# EAGLE board Quadv3 (EAGLE 9.2.1)
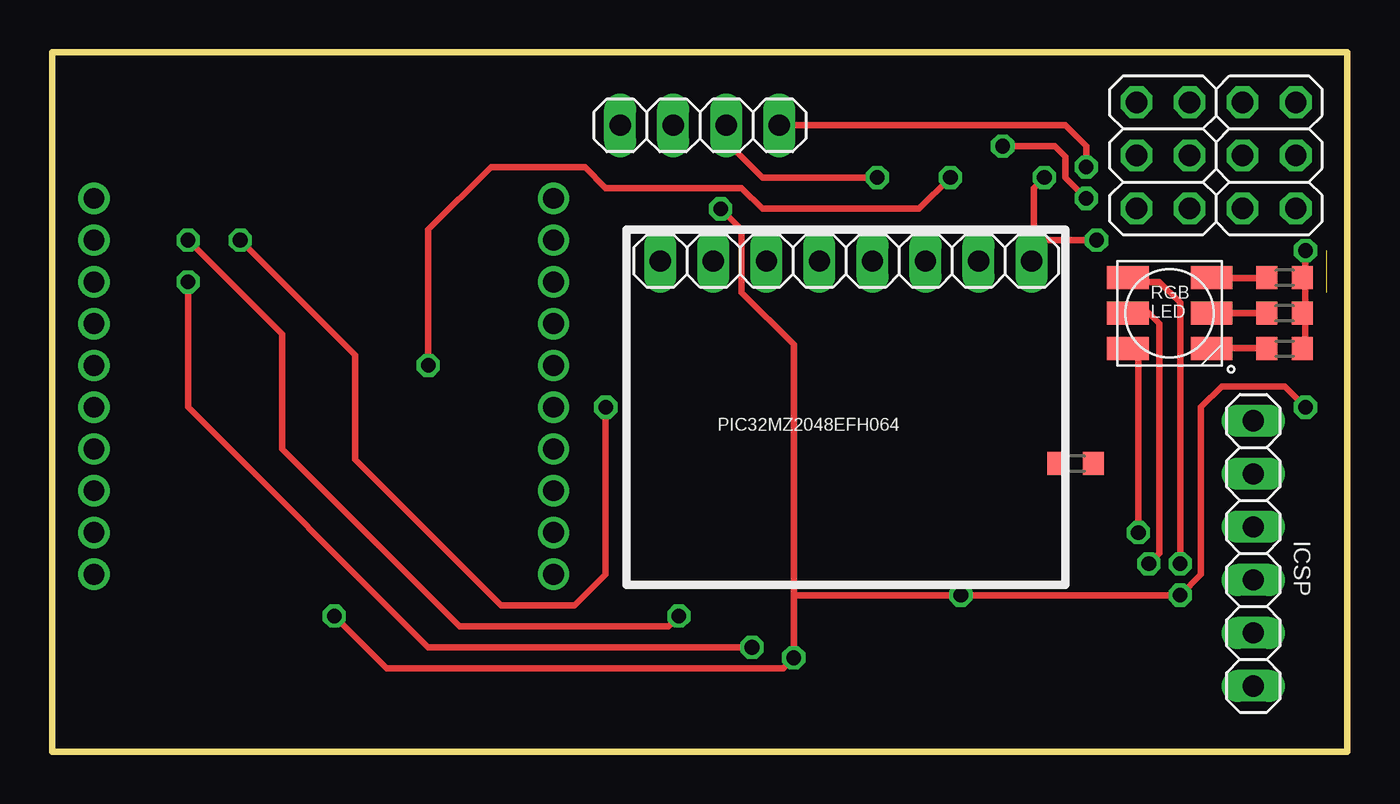
[diagram p0: board, top side]
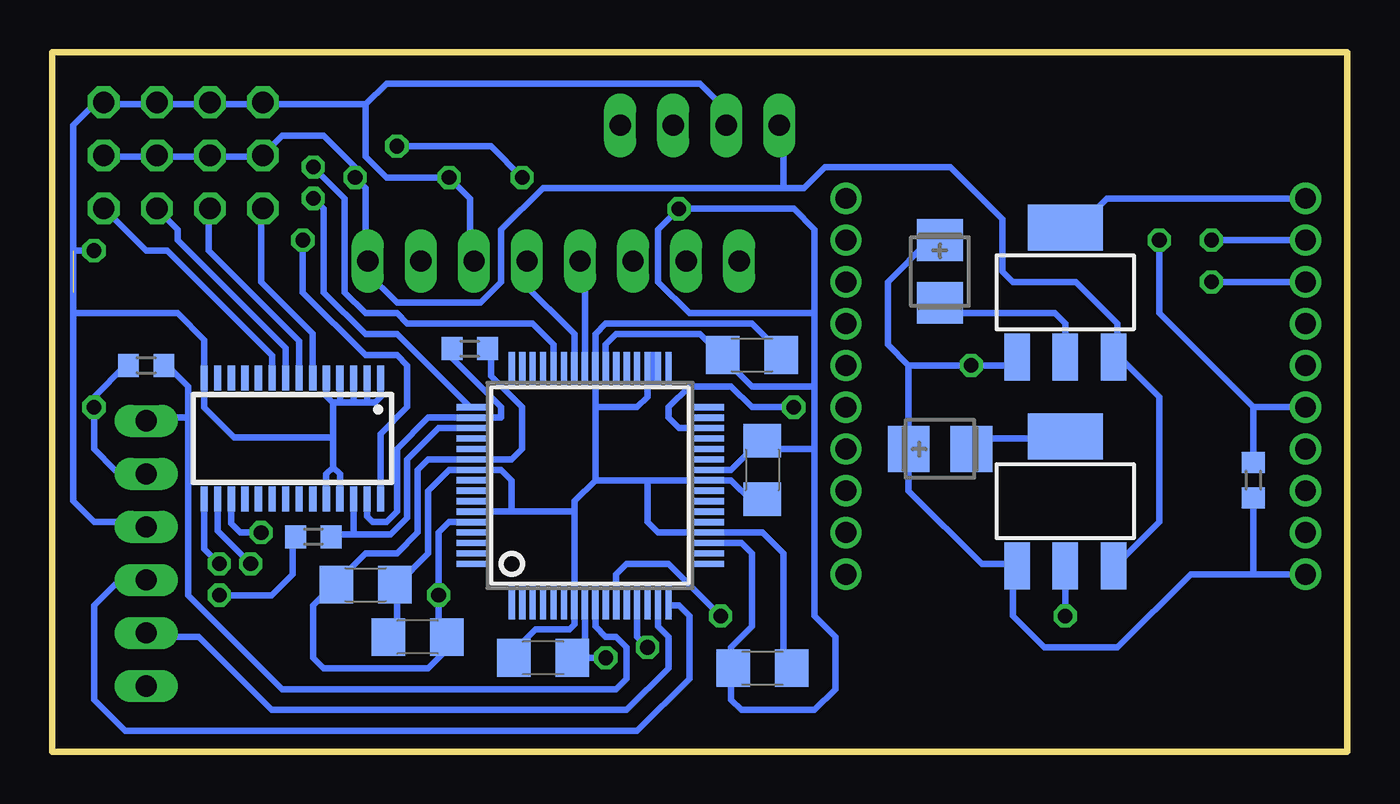
[diagram p1: board, bottom side, seen from below]

Size 62 x 33.5 mm. Coordinates in mm from the lower left corner, seen from the top.
Outline: 0,33.5 0,0 62,0 62,33.5 0,33.5
Copper layers (1*16): Top 0.035mm / dielectric 1.5mm / Bottom 0.035mm
Design rules "default": minimum track width 10mil, minimum drill 24mil, track to track 8mil, track to pad 8mil, pad to pad 8mil, via to via 8mil, smd to smd 8mil, copper to edge 40mil, drill to drill 8mil, minimum pad ring 10mil, minimum via ring 8mil, stop-mask expansion 4mil, vias tented up to drill 0mil, thermal gap 10mil

## Footprints (pad centres in the part's own frame; a part is rotated, then mirrored left to right if it is on the bottom)
1X06 = drill 1.016 long: 1 -6.35,0; 2 -3.81,0; 3 -1.27,0; 4 1.27,0; 5 3.81,0; 6 6.35,0
C1206 = smd 1.6 x 1.8: 1 -1.4,0; 2 1.4,0
TSSOP28 = smd 0.35 x 1.2: 1 -4.225,-2.9; 2 -3.575,-2.9; 3 -2.925,-2.9; 4 -2.275,-2.9; 5 -1.625,-2.9; 6 -0.975,-2.9; 7 -0.325,-2.9; 8 0.325,-2.9; 9 0.975,-2.9; 10 1.625,-2.9; 11 2.275,-2.9; 12 2.925,-2.9; 13 3.575,-2.9; 14 4.225,-2.9; 15 4.225,2.9; 16 3.575,2.9; 17 2.925,2.9; 18 2.275,2.9; 19 1.625,2.9; 20 0.975,2.9; 21 0.325,2.9; 22 -0.325,2.9; 23 -0.975,2.9; 24 -1.625,2.9; 25 -2.275,2.9; 26 -2.925,2.9; 27 -3.575,2.9; 28 -4.225,2.9
1X04 = drill 1.016 long: 1 -3.81,0; 2 -1.27,0; 3 1.27,0; 4 3.81,0
SOT223 = smd 1.219 x 2.235: 1 -2.311,-3.099; 2 0,-3.099; 3 2.311,-3.099 | smd 3.6 x 2.2: 4 0,3.099
R0603 = smd 1 x 1.1: 1 -0.85,0; 2 0.85,0
1X08 = drill 1.016 long: 1 -8.89,0; 2 -6.35,0; 3 -3.81,0; 4 -1.27,0; 5 1.27,0; 6 3.81,0; 7 6.35,0; 8 8.89,0
2X03 = drill 1.016 octagon: 1 -2.54,-1.27; 2 -2.54,1.27; 3 0,-1.27; 4 0,1.27; 5 2.54,-1.27; 6 2.54,1.27
RGBLED5050 = smd 2 x 1.1: 1 -2,1.7; 2 -2,0; 3 -2,-1.7; 4 2,-1.7; 5 2,0; 6 2,1.7
CT3528 = smd 2 x 2.2: + -1.5,0; - 1.5,0
SQFP-S-10X10-64 = smd 0.3 x 1.6: 1 -3.75,-5.6; 2 -3.25,-5.6; 3 -2.75,-5.6; 4 -2.25,-5.6; 5 -1.75,-5.6; 6 -1.25,-5.6; 7 -0.75,-5.6; 8 -0.25,-5.6; 9 0.25,-5.6; 10 0.75,-5.6; 11 1.25,-5.6; 12 1.75,-5.6; 13 2.25,-5.6; 14 2.75,-5.6; 15 3.25,-5.6; 16 3.75,-5.6; 33 3.75,5.6; 34 3.25,5.6; 35 2.75,5.6; 36 2.25,5.6; 37 1.75,5.6; 38 1.25,5.6; 39 0.75,5.6; 40 0.25,5.6; 41 -0.25,5.6; 42 -0.75,5.6; 43 -1.25,5.6; 44 -1.75,5.6; 45 -2.25,5.6; 46 -2.75,5.6; 47 -3.25,5.6; 48 -3.75,5.6 | smd 1.6 x 0.3: 17 5.6,-3.75; 18 5.6,-3.25; 19 5.6,-2.75; 20 5.6,-2.25; 21 5.6,-1.75; 22 5.6,-1.25; 23 5.6,-0.75; 24 5.6,-0.25; 25 5.6,0.25; 26 5.6,0.75; 27 5.6,1.25; 28 5.6,1.75; 29 5.6,2.25; 30 5.6,2.75; 31 5.6,3.25; 32 5.6,3.75; 49 -5.6,3.75; 50 -5.6,3.25; 51 -5.6,2.75; 52 -5.6,2.25; 53 -5.6,1.75; 54 -5.6,1.25; 55 -5.6,0.75; 56 -5.6,0.25; 57 -5.6,-0.25; 58 -5.6,-0.75; 59 -5.6,-1.25; 60 -5.6,-1.75; 61 -5.6,-2.25; 62 -5.6,-2.75; 63 -5.6,-3.25; 64 -5.6,-3.75

## Placement (x,y rotation side)
E$1  [1X06]  57.5,9.5 90 top
E$2  [C1206]  28.5,19 0 bottom
E$3  [C1206]  28,13.5 270 bottom
E$4  [C1206]  28,4 180 bottom
E$5  [TSSOP28]  50.5,15 180 bottom
E$6  [1X04]  31,30 0 top
E$7  [SOT223]  13.5,22 0 bottom
E$8  [R0603]  4.5,13 270 bottom
E$9  [R0603]  49.5,10.3 180 bottom
E$10  [1X08]  38,23.5 0 top
E$11  [2X03]  58.26,28.56 90 top
E$12  [2X03]  53.18,28.56 90 top
E$13  [R0603]  57.5,18.5 0 bottom
E$14  [R0603]  59,22.7 0 top
E$15  [R0603]  59,21 0 top
E$16  [R0603]  59,19.3 0 top
E$17  [C1206]  38.5,4.5 180 bottom
E$18  [C1206]  47,8 0 bottom
E$19  [C1206]  44.5,5.5 180 bottom
E$20  [RGBLED5050]  53.5,21 0 top
E$21  [SOT223]  13.5,12 0 bottom
E$22  [R0603]  42,19.3 180 bottom
E$23  [CT3528]  19.5,14.5 0 bottom
E$27  [CT3528]  19.5,23 270 bottom
E$28  [R0603]  49,13.8 180 top
PIC32MZ2048EFH064  [SQFP-S-10X10-64]  36.25,12.75 0 bottom

## Library data of the parts
E$1 E$6 E$10-E$12 = pinhead
E$2-E$4 E$7-E$9 E$13-E$19 E$21-E$23 E$27 E$28 PIC32MZ2048EFH064 = smd-ipc
E$5 = analog-devices
E$20 = adafruit

## Nets
S$33: E$23.+ E$27.+
S$38: E$20.2

## Tracks (layer width: path | path; a pad name or v marks a point on that pad's centre or on a via)
S$1
  Bottom 0.305: 55.5,16 57.5,16
S$2  (via drill 1)
  other vias: 24,26.5
S$3  (via drill 1)
  other vias: 24,24.5
S$4  (via drill 1)
  other vias: 24,22.5
S$5  (via drill 1)
  other vias: 24,20.5
S$6  (via drill 1)
  other vias: 24,18.5
S$7  (via drill 1)
  other vias: 24,16.5
S$8
  Bottom 0.305: 49.52,17.82 49.52,20.02 52,22.5 52,26
S$9  (via drill 1)
  other vias: 24,10.5
S$10
  Bottom 0.305: 56.5,18.5 55.5,17.5 55.5,7.5 51,3 35,3 34.5,3.5 34.5,5 35,5.5 35.5,5.5 36,6 36,7
S$11
  Bottom 0.305: 32.5,7 32,7 31.5,6.5 31.5,3.5 34,1 58.5,1 60,2.5 60,7 59,8 56.5,8
S$12
  Bottom 0.305: 45.5,8 44,9.5 44,12.5 43,13.5 40.5,13.5 40,13 40,11.5 | 45.5,8 46,7.5 | 45.5,8 45.5,5.5 | 33.5,18 33.5,17 34,16.5 36,16.5 | 33.5,13 31,13 | 33.5,13 33.5,11 33,10.5 28,10.5 27,9.5 27,4 | 36,16.5 36,20 35.5,20.5 28.5,20.5 27,19 | 36,16.5 36,13 | 36,13 33.5,13 | 42,11.5 40,11.5 | 36,13 37,12 37,11.5 | 40,11.5 37,11.5 | 37,11.5 37,6.11 37.24,5.86 38.85,5.86 39.51,5.21
S$14  (via drill 1)
  other vias: 24,8.5
S$15
  Bottom 0.305: 37,18.5 37,20 39.5,22.5 39.5,24.5
S$16  (via drill 1)
  other vias: 24,12.5
S$17
  Bottom 0.305: 36.5,18.5 36.5,24.5
S$18  (via drill 0.7)
  Top 0.305: v60,16.5 59,17.5 56,17.5 55,16.5 55,8.5 54,7.5 v43.5,7.5 35.5,7.5 | v13.5,6.5 16,4 35,4 v35.5,4.5 35.5,7.5 | 35.5,7.5 35.5,19.5 33,22 33,25 v32,26
  Bottom 0.305: 57.5,13.5 59,13.5 60,14.5 v60,16.5 60,17 58.5,18.5 | 42,11 43,11 43.5,10.5 v43.5,7.5 43.5,6 | v35.5,4.5 37,4.5 | v13.5,6.5 13.5,9 | 30.5,13.5 29.5,13.5 28.5,14.5 25.5,14.5 | 31,10 29,10 28.5,9.5 28.5,6 29.5,5 29.5,2.5 29,2 25.5,2 24.5,3 24.5,5.5 25.5,6.5 25.5,14.5 | 25.5,21 25.5,25 26.5,26 v32,26 33,25 33,22.5 31.5,21 25.5,21 | 25.5,17.5 25.5,14.5 | 25.5,21 25.5,17.5 | 25.5,17.5 28.5,17.5 31,20 35,20 35.5,19.5 35.5,18.5
S$20  (via drill 0.7)
  Top 0.305: 51.5,22.5 53,22.5 54,21.5 v54,9
  Bottom 0.305: 54.73,12.07 54.73,9.72 v54,9
S$21  (via drill 1)
  other vias: 24,14.5
S$22
  Bottom 0.305: 42.5,5.5 44,4 49,4 49.5,4.5 49.5,7 47,9.5 45.5,9.5 44.5,10.5 44.5,13.5 44,14 42,14
S$23  (via drill 0.7)
  Bottom 0.305: v54,7.5 51.5,7.5 50.5,8.5 50.5,10
S$24
  Bottom 0.305: 30.5,13 29.5,13 28.5,12
S$25
  Bottom 0.305: 50.17,17.82 50.17,19.68 54.5,24 54.5,26
S$26
  Bottom 0.305: 50.83,17.8 50.83,19.32 56,24.5 56,25 57,26
S$27
  Bottom 0.305: 48.23,12.4 48.23,13.3 48.55,13.62 48.88,13.3 48.88,12.47
S$28
  Bottom 0.305: 43,19 40.5,16.5 40.5,16 44,16 45.5,14.5 45.5,11.5 46,11 46.66,11 46.93,11.27 46.93,12.24
S$29
  Bottom 0.305: 36.5,4.5 36.5,7
S$30
  Bottom 0.305: 51.48,17.85 51.48,18.98 56.5,24 57.5,24 59.5,26
S$31
  Bottom 0.305: 48.52,10.5 48.58,10.55
S$32  (via drill 0.7, 1)
  Top 0.305: v9,24.5 14.5,19 14.5,14 21.5,7 25,7 26.5,8.5 v26.5,16.5
  Bottom 0.305: 30.5,15.5 32,15.5 32.5,16 32.5,16.5 31.5,17.5 29.5,17.5 28.5,16.5 v26.5,16.5 | v9,24.5 9,21 4.5,16.5 | v2,16.5 4.5,16.5 | 4.5,16.5 4.5,14
S$33  (via drill 0.7, 1)  (1 unrouted)
  Top 0.305: v18,18.5 18,25 21,28 25.5,28 26.5,27 33,27 34,26 41.5,26 v43,27.5
  Bottom 0.305: 48.55,15.05 53.3,15.05 54.73,16.48 54.73,19.73 56,21 61,21 | 46.27,17.82 46.27,17 46.55,16.73 46.92,16.73 | 46.92,16.73 47.58,16.73 | 47.58,16.73 48.23,16.73 | 48.23,16.73 48.55,16.73 48.55,16.7 | 46.92,17.8 46.92,16.73 | 47.58,17.8 47.58,16.73 | 48.23,17.8 48.23,16.73 | 48.55,13.6 48.55,15.05 | 48.55,15.05 48.55,16.7 | 48.55,16.7 48.88,17.02 48.88,17.73 | E$27.+ 20,24.5 22,22.5 22,19.5 21,18.5 | 16,18.5 v18,18.5 21,18.5 | 21,18.5 E$23.+ | E$23.+ 21,13.5 | E$23.+ 21,12.5 17.5,9 16,9 16,6.5 14.5,5 11,5 7.5,8.5 4.5,8.5 | 4.5,12 4.5,8.5 | v2,8.5 4.5,8.5 | 57.5,11 60,11 61,12 61,21 | 61,24 61,21 | 61,24 61,30 60,31 47,31 | 42,24.5 42,26.5 v43,27.5 46,27.5 47,28.5 47,31 | 47,31 46,32 31,32 29.5,30.5 | 60,24 61,24
S$34  (via drill 1)
  Bottom 0.305: v2,26.5 11.5,26.5 13,25
S$35
  Top 0.305: 55.41,22.68 58.3,22.68
S$36
  Top 0.305: 55.39,21.02 58.28,21.02
S$37  (via drill 0.7)
  Top 0.305: 49.5,26.5 48.5,27.5 48.5,28.5 48,29 v45.5,29 | v39.5,27.5 34,27.5 32.5,29
  Bottom 0.305: v39.5,27.5 41,29 v45.5,29
S$38  (via drill 0.7)
  Top 0.305: E$20.2 52.5,21 53,20.5 53,9.5 v52.5,9
  Bottom 0.305: 54.08,12.07 54.08,10.57 v52.5,9
S$39  (via drill 1)
  other vias: 2,20.5
S$40
  Bottom 0.305: 33,7 33,6 32.5,5.5 32.5,4 34.5,2 51.5,2 55,5.5 57.5,5.5
S$41  (via drill 1)
  other vias: 2,18.5
S$42
  Top 0.305: 55.44,19.32 58.33,19.32
S$43  (via drill 0.7)
  Top 0.305: v52,10.5 52,19.5
  Bottom 0.305: 53.42,12.03 53.42,10.93 53,10.5 v52,10.5
S$44
  Bottom 0.305: 18,15 13.5,15
S$45
  Bottom 0.305: 42,15.5 43.5,15.5 45,14 45,11.2 45.8,10.4 47.58,10.4 | 47.58,10.4 48.82,10.4 | 47.58,12 47.58,10.4
S$46  (via drill 1)
  other vias: 2,10.5
S$47
  Bottom 0.305: 11,19 9,17 9,11 11,9
S$48  (via drill 1)
  other vias: 2,12.5
S$49  (via drill 1)
  other vias: 2,14.5
S$50  (via drill 0.7)
  Top 0.305: v60,24 60,19
S$51
  Bottom 0.305: 41.5,14 40,14 39.5,14.5 39.5,16.5 41,18 41,19
S$52  (via drill 0.7)
  Top 0.305: 50,24.5 47,24.5 47,27 v47.5,27.5
  Bottom 0.305: 47,27 v47.5,27.5 47.5,28 49,29.5 51,29.5 52,28.5 60,28.5
S$53
  Bottom 0.305: 13.5,19 13.5,20.5 14,21 19.5,21
S$54
  Bottom 0.305: 11,19 11,20.5 13,22.5 16,22.5 16.5,23 16.5,25.5 19,28 25,28 26,27 27,27 | 27,27 38.5,27 40.5,25 40.5,22.5 41.5,21.5 45.5,21.5 47,23 47,27 | 27,30 27,27
S$55  (via drill 0.7, 1)
  Top 0.305: v30,6.5 29.5,6 19.5,6 11,14.5 11,20 v6.5,24.5
  Bottom 0.305: 35,7 35,8.5 34.5,9 32.5,9 v30,6.5 | v2,24.5 v6.5,24.5
S$56  (via drill 0.7)
  Bottom 0.305: 42,16.5 45.5,20 47,20 49,22 49,26 v49.5,26.5
S$58  (via drill 0.7)
  Bottom 0.305: v50,24.5 50,22 47,19 45.5,19 45,18.5 45,16.5 46.28,15.22 46.28,11.73
S$66  (via drill 0.7, 1)
  Top 0.305: v33.5,5 18,5 6.5,16.5 v6.5,22.5
  Bottom 0.305: 34,7 34,5.5 v33.5,5 | v2,22.5 v6.5,22.5
S$69  (via drill 0.7)
  Top 0.305: v49.5,28 49.5,29 48.5,30 34.5,30
  Bottom 0.305: v49.5,28 48,26.5 48,22 47,21 45.5,21 45,20.5 39,20.5 38,19.5 38,18.5
(copper drawn outside any net)
  shapes: Bottom area x1

## Text on the board
tPlace: RGB / LED | ICSP
Reference: 100uF | 3.3v | 10DOF | 0.1uF | Vusb | Vss | Vdd | Vss | SDA5 | SCL5 | 33 | 48 | 32 | 49 | 100uF | Vdd | 0.1uF | Vdd | Vss | Vss | 3.3v | Vdd | Vss | AVss | AVdd | 17 | 64 | 16 | 1 | 0.1uF | Vdd | Vss | 0.1uF | 0.1uF | 0.1uF